# Altium PCB STM32F103最小系统板.PcbDoc
Units mm, origin at the board's own origin, x right, y up, seen from the top; angles counter-clockwise.
Board outline 39.3 x 39.28 mm, 2 copper layers (Top Layer, Bottom Layer); 25 components, 60 nets, 131 pads, 48 vias.
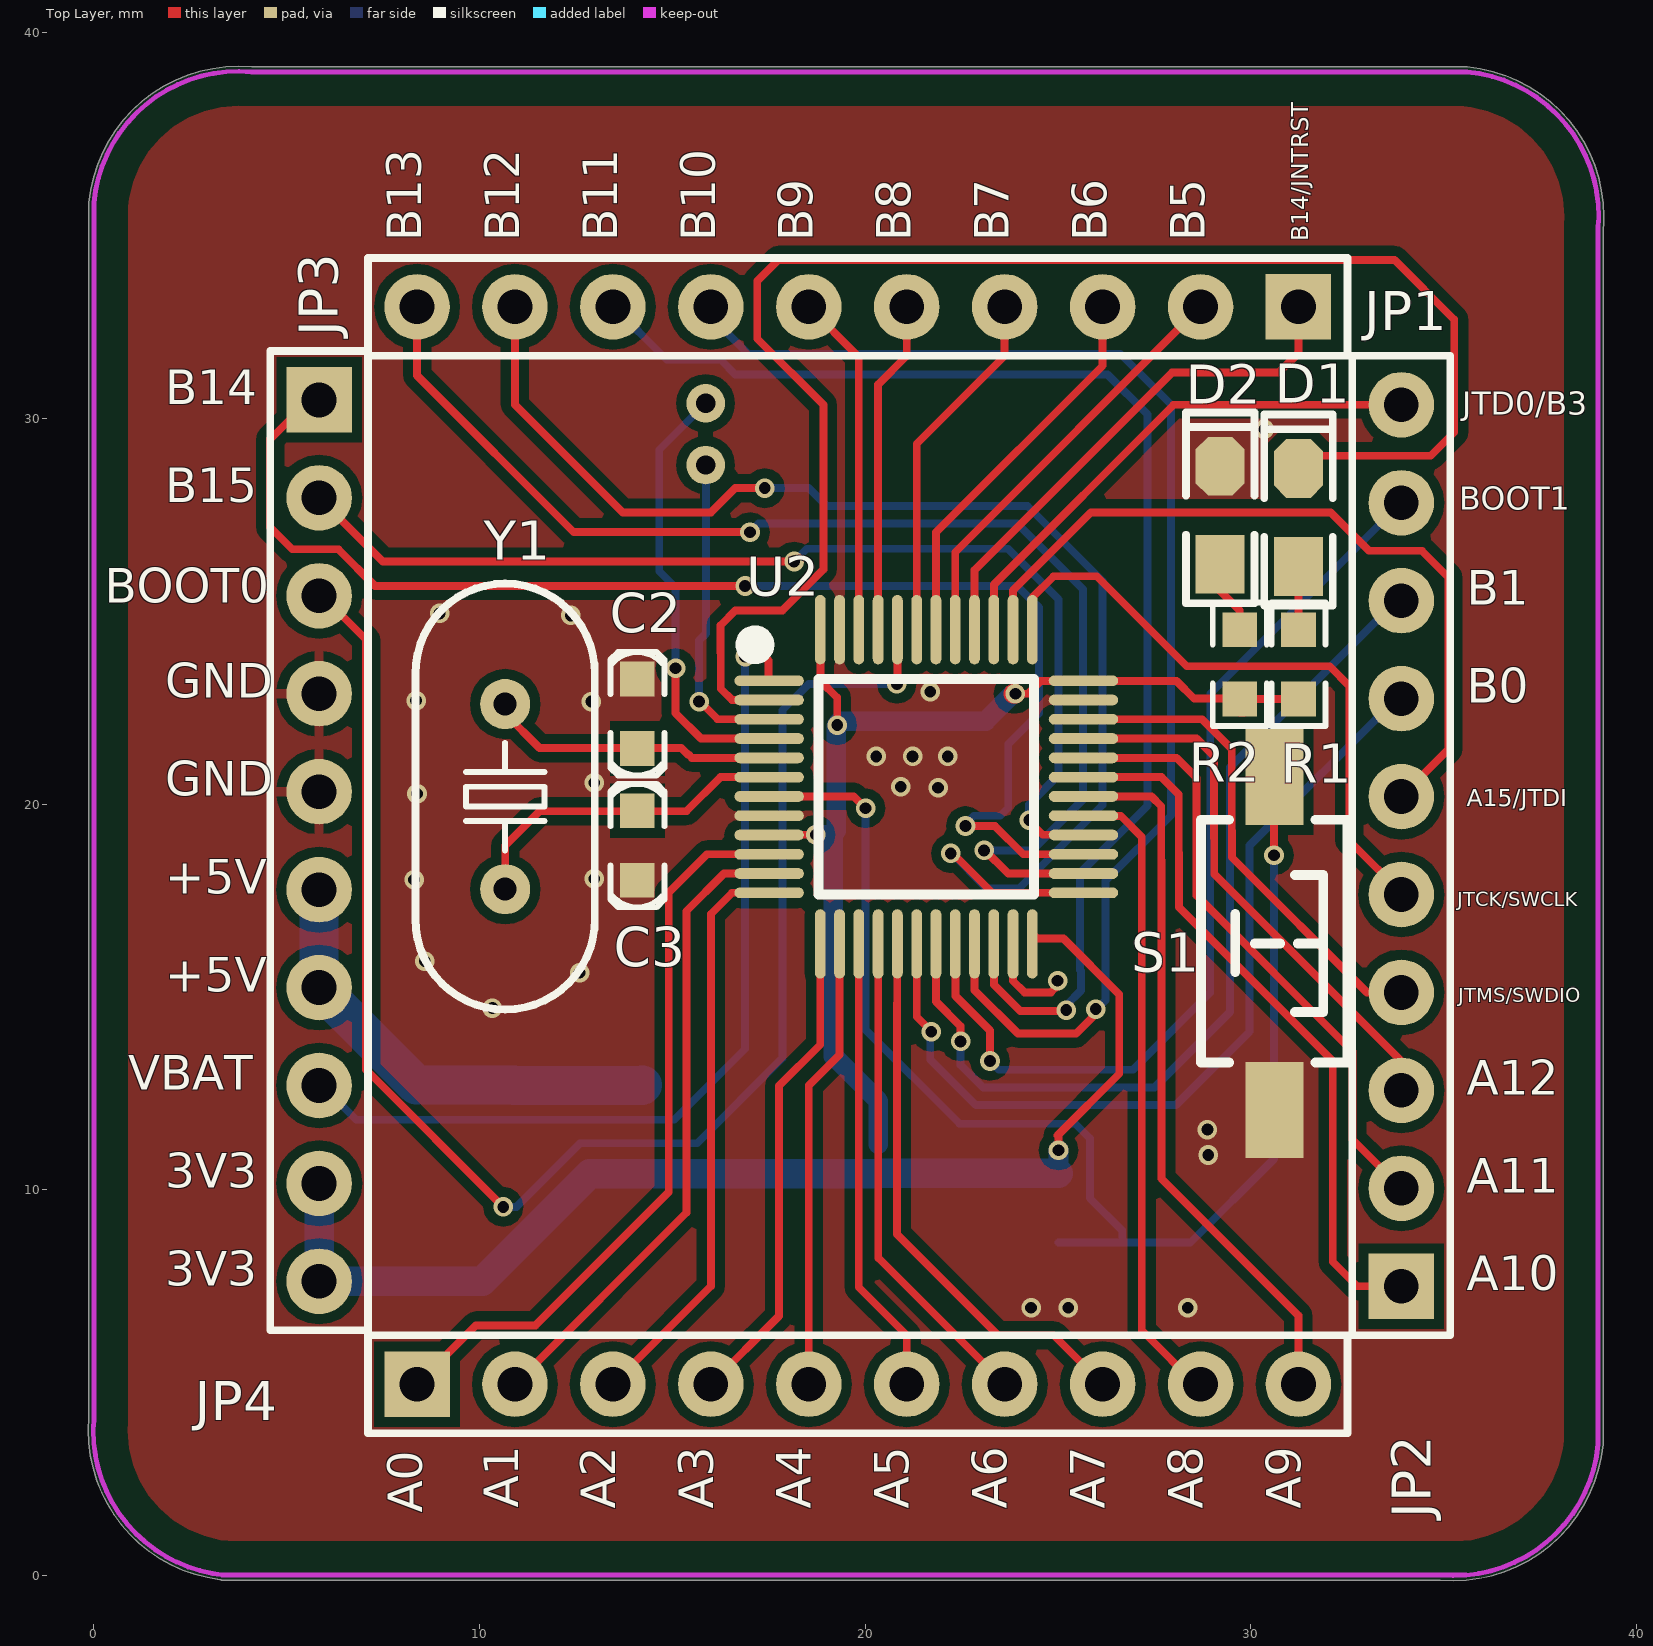
[diagram p0: Top Layer view]
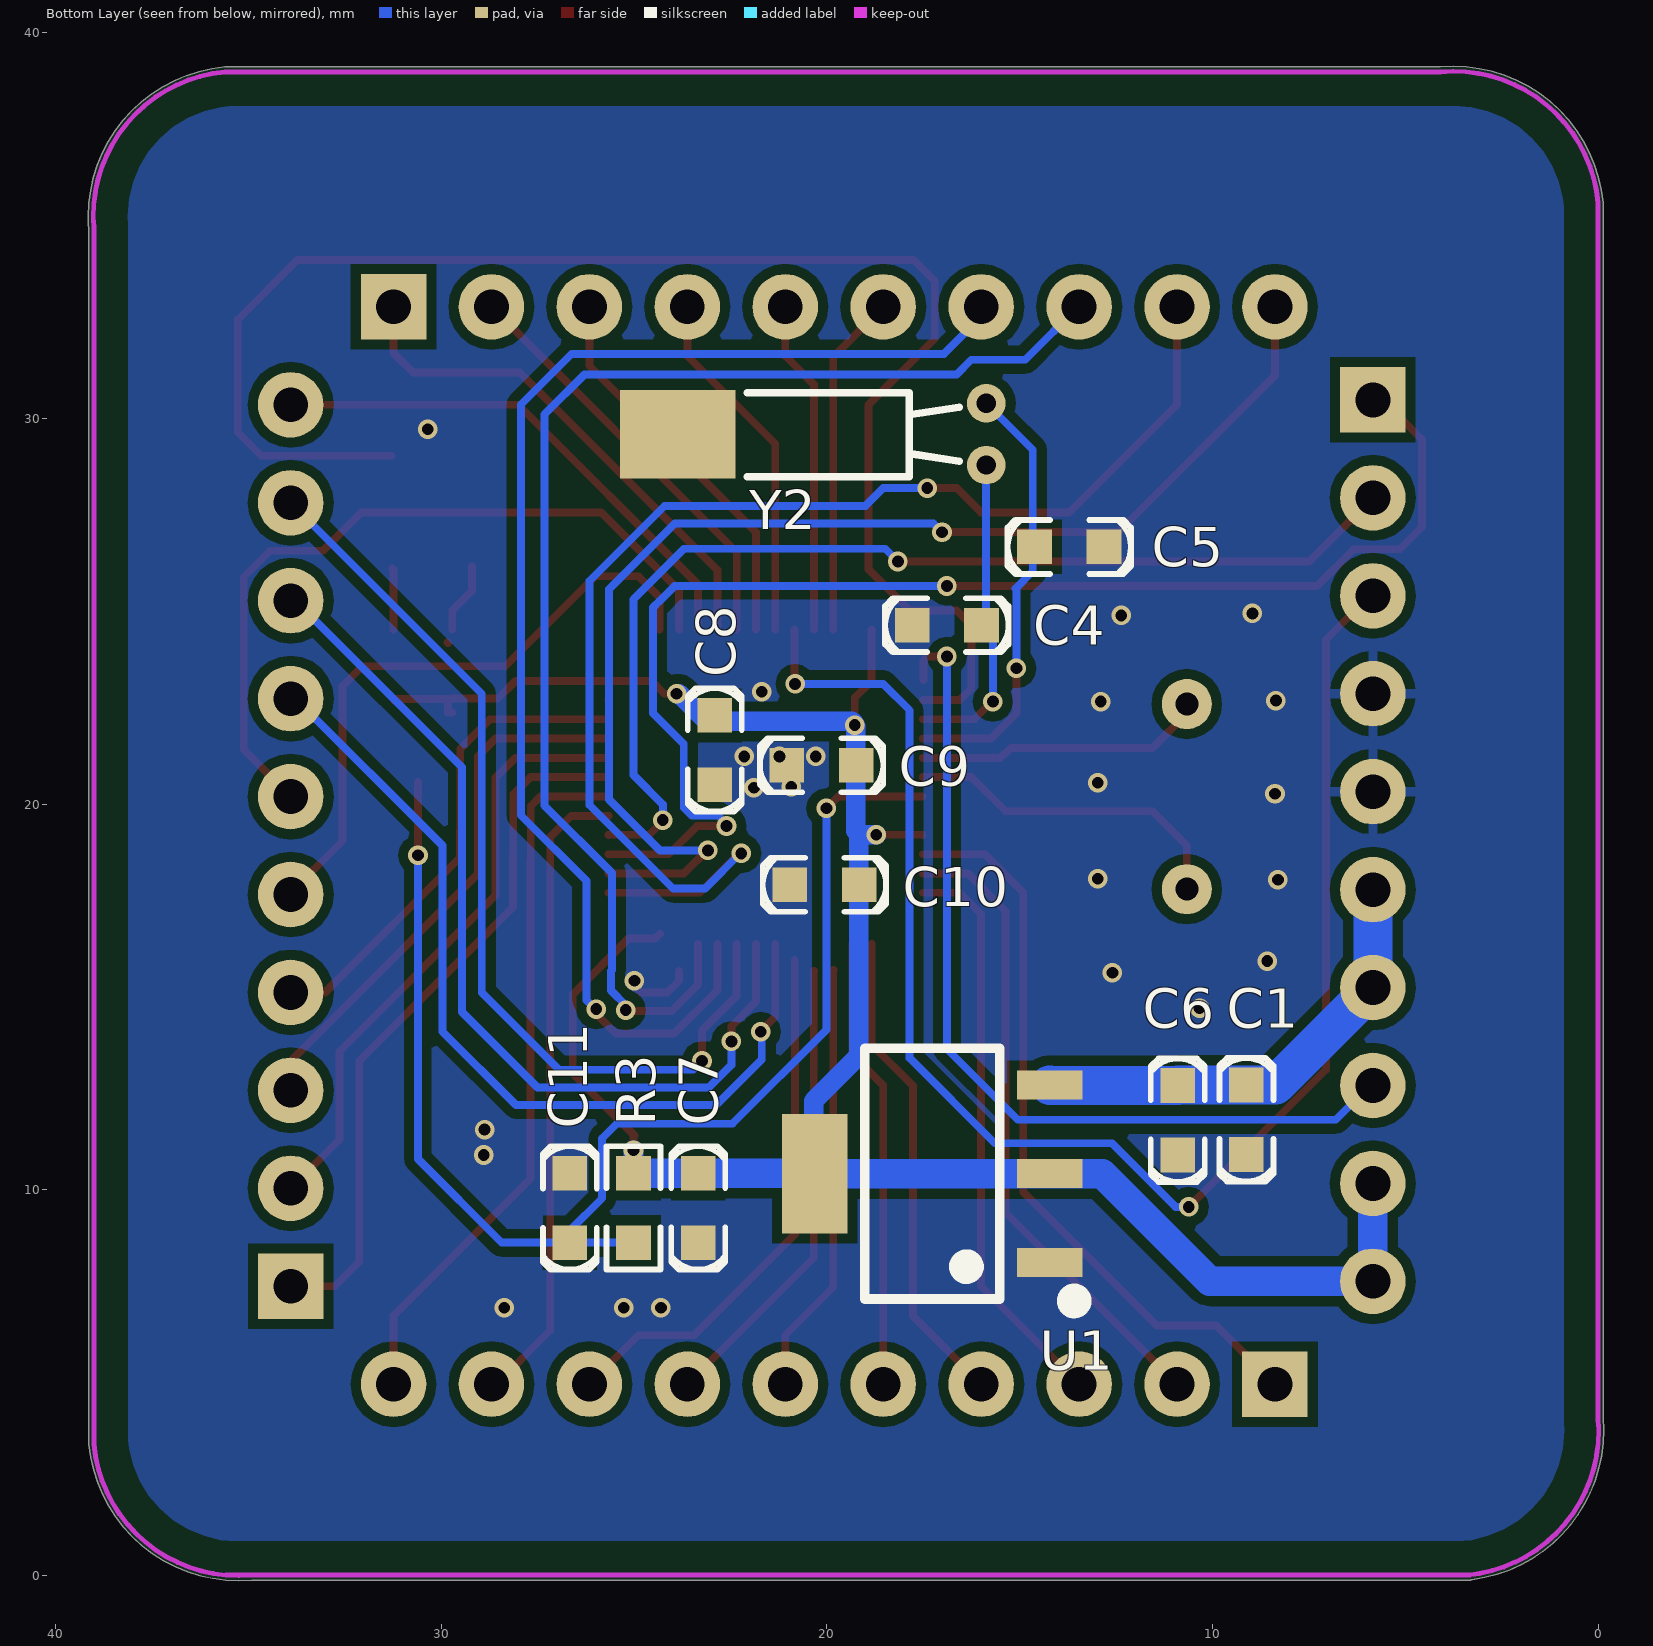
[diagram p1: Bottom Layer view, seen from below]

## Layer stack, top to bottom
Top Solder: solder mask 0.0102, Solder Resist, Dk 3.5
Top Layer: signal copper 0.0356
Dielectric 1: dielectric 0.32, FR-4, Dk 4.8
Bottom Layer: signal copper 0.0356
Bottom Solder: solder mask 0.0102, Solder Resist, Dk 3.5

## Board outline
3.27,-0.114 cw(c3.746,3.746) -0.127,4.095 -0.127,35.56 cw(c0,35.56) -0.127,35.573 cw(c0,35.585) -0.127,35.597 cw(c3.746,35.242) 4.095,39.116 35.611,39.116 cw(c35.611,38.989) 35.622,39.116 cw(c35.268,35.242) 39.157,35.242 cw(c35.268,35.242) 39.142,34.894 39.142,3.429 cw(c39.014,3.429) 39.141,3.416 cw(c39.014,3.404) 39.142,3.404 cw(c39.014,3.404) 39.141,3.392 cw(c35.268,3.746) 34.919,-0.127 3.327,-0.127 cw(c3.327,0)

## Design rules (kind name [scope] priority, off if disabled: settings)
Clearance [All] p1: gap=0.254 ignorepadtopadclearanceinfootprint=FALSE except(0: Arc-Hole Track-Hole SMDPad-Hole THPad-Hole Via-Hole Fill-Hole Poly-Hole Region-Hole Text-Hole; 0.127: SMDPad-SMDPad; 0.203: Arc-Arc Arc-Track Track-Track)
MinimumSolderMaskSliver [All] p1: minsoldermaskwidth=0.051
PolygonConnect [IsVia] p1: connectstyle=Direct reliefconductorwidth=0.381 reliefentries=4 polygonreliefangle="90 Angle" airgapwidth=0.381
PolygonConnect PolygonConnect_1 [All] p2: thpad.connectstyle=Relief thpad.reliefconductorwidth=0.254 thpad.reliefentries=4 thpad.polygonreliefangle="90 Angle" thpad.airgapwidth=0.254 smdpad.connectstyle=Direct smdpad.reliefconductorwidth=0.254 smdpad.reliefentries=4 smdpad.polygonreliefangle="90 Angle" smdpad.airgapwidth=0.254 via.connectstyle=Relief via.reliefconductorwidth=0.254 via.reliefentries=4 via.polygonreliefangle="90 Angle" via.airgapwidth=0.254
RoutingVias [All] p1: holewidth=0.711 width=1.27 viastyle="Through Hole" minholewidth=0.711 minwidth=1.27 maxholewidth=0.711 maxwidth=1.27
SilkToSilkClearance [All] p1: silktosilkclearance=0.051
SilkToSolderMaskClearance [IsPad] p1: minsilkscreentomaskgap=0 clearancetoexposedcopper=TRUE
SolderMaskExpansion [All] p1: expansion=0.102
UnRoutedNet [All] p1: checkbadconnections=TRUE
Width [InNet('No Net')] p1: maxlimit=2.54 minlimit=0.152 preferedwidth=0.254 minimp=50.000000 maximp=50.000000 favimp=50.000000
26 further rules are at their usual default settings.

## Classes and differential pairs
component class STM32F103最小系统板: C7 C9 C10 C11 D1 S1 U2 Y1 Y2

## Components (designator, comment, footprint, x,y, rotation, side; value= is the part's Value field where it differs from the comment)
C1 "X7R\10uF\50V\10%" C0603 9.125,11.811 r270 bottom locked
C2 "22pF" C0603 14.097,22.341 r270 top locked
C3 "22pF" C0603 14.097,18.923 r90 top locked
C4 "22pF" C0603 16.891,24.638 r180 bottom
C5 "22pF" C0603 13.716,26.67 r0 bottom
C6 "X7R\100nF\50V\10%" C0603 10.903,11.8 r270 bottom locked
C7 "X7R\10uF\50V\10%" C0603 23.34,9.525 r270 bottom locked
C8 "X7R\10uF\50V\10%" C0603 22.911,21.401 r270 bottom
C9 "X7R\10uF\50V\10%" C0603 20.142,21.006 r0 bottom
C10 "X7R\10uF\50V\10%" C0603 20.066,17.907 r0 bottom
C11 "X7R\100nF\50V\10%" C0603 26.67,9.525 r90 bottom locked
D1 "LED\0805" "LED 0805R" 31.242,27.432 r90 top
D2 "LED\0805" "LED 0805R" 29.21,27.491 r90 top
JP1 "HDR-1X10" HDR2.54-LI-10P 19.812,32.893 r180 top locked
JP2 "HDR-1X10" HDR2.54-LI-10P 33.909,18.923 r90 top locked
JP3 "HDR-1X10" HDR2.54-LI-10P 5.842,19.05 r270 top locked
JP4 "HDR-1X10" HDR2.54-LI-10P 19.812,4.953 r0 top locked
R1 "300R\1%\R0603" R0603 31.242,23.622 r270 top
R2 "300R\1%\R0603" R0603 29.718,23.622 r270 top
R3 "10K\1%\R0603" R0603 25.019,9.525 r270 bottom locked
S1 "SW-PB" "TSW SMD-3*6*4.3" 30.616,16.383 r270 top locked
U1 "AMS1117-3.3V" SOT223_L 17.272,10.414 r90 bottom locked
U2 "STM32F103C8T6" LQFP48-7*7 21.59,20.447 r270 top locked
Y1 "8MHz" "OSC HC-49S" 10.668,20.193 r90 top locked
Y2 "32.768KHz" OSC-2x6-WI-B 15.868,29.591 r90 bottom locked

## Footprints (in the part's own frame and the unit in brackets; to place one, negate y for a bottom-side part, rotate by r counter-clockwise, add the part's x,y. Pads: shape width x height; smd on the part's side, far side on the other; paste and mask are expansions set on the pad)
C0603 [mm]
  rect 0.9x0.9 smd: 1(-0.9,0) 2(0.9,0)
  silkscreen extent -1.6,-0.7 1.6,0.7, body extent -0.8,-0.4 0.8,0.4, height 0.3
HDR2.54-LI-10P [mm] "排针，10脚"
  rect 1.7x1.7 hole 0.9: 1(-11.43,0)
  round 1.7 hole 0.9: 2(-8.89,0) 3(-6.35,0) 4(-3.81,0) 5(-1.27,0) 6(1.27,0) 7(3.81,0) 8(6.35,0) 9(8.89,0) 10(11.43,0)
  silkscreen extent -12.7,-1.27 12.7,1.27, body extent -12.7,-1.27 12.7,1.27, height 8.5
"LED 0805R" [mil] "红色0805LED"
  rect 60x50 smd: 1(-50,0)
  oct 60x50 smd: 2(50,0)
  silkscreen extent -90,-35 105,35, body extent -39,-25 39,25, height 32
LQFP48-7*7 [mm] "7x7mm，0.5mm（蒜米工坊）"
  oval 0.279x1.8 smd: 1(-2.75,-4.075) 2(-2.25,-4.075) 3(-1.75,-4.075) 4(-1.25,-4.075) 5(-0.75,-4.075) 6(-0.25,-4.075) 7(0.25,-4.075) 8(0.75,-4.075) 9(1.25,-4.075) 10(1.75,-4.075) 11(2.25,-4.075) 12(2.75,-4.075) 25(2.75,4.075) 26(2.25,4.075) 27(1.75,4.075) 28(1.25,4.075) 29(0.75,4.075) 30(0.25,4.075) 31(-0.25,4.075) 32(-0.75,4.075) 33(-1.25,4.075) 34(-1.75,4.075) 35(-2.25,4.075) 36(-2.75,4.075)
  oval 1.8x0.279 smd: 13(4.075,-2.75) 14(4.075,-2.25) 15(4.075,-1.75) 16(4.075,-1.25) 17(4.075,-0.75) 18(4.075,-0.25) 19(4.075,0.25) 20(4.075,0.75) 21(4.075,1.25) 22(4.075,1.75) 23(4.075,2.25) 24(4.075,2.75) 37(-4.075,2.75) 38(-4.075,2.25) 39(-4.075,1.75) 40(-4.075,1.25) 41(-4.075,0.75) 42(-4.075,0.25) 43(-4.075,-0.25) 44(-4.075,-0.75) 45(-4.075,-1.25) 46(-4.075,-1.75) 47(-4.075,-2.25) 48(-4.075,-2.75)
  silkscreen extent -3.93,-4.69 2.79,2.79, body extent -4.5,-4.5 4.5,4.5, height 1.45
"OSC HC-49S" [mm]
  round 1.3 hole 0.6: 1(-2.4,0) 2(2.4,0)
  silkscreen extent -5.52,-2.32 5.52,2.33, body extent -5.53,-2.32 5.53,2.32, height 4.13
OSC-2x6-WI-B [mm] "脚距：1.6mm"
  rect 2.3x3 smd: 0(0,8)
  round 1 hole 0.5: 1(0.8,0) 2(-0.8,0)
  silkscreen extent -1.1,0.7 1.07,6.2, body extent -1,-0.16 1,8, height 2.05
R0603 [mm]
  rect 0.9x0.9 smd: 1(-0.9,0) 2(0.9,0)
  silkscreen extent -1.6,-0.7 1.6,0.7, body extent -1.3,-0.5 1.3,0.5, height 0.53
SOT223_L [mm] "6.4x7x1.6mm(长宽高)"
  rect 0.75x1.7 smd: 1(-2.3,-3.048) 2(0,-3.048) 3(2.3,-3.048)
  rect 3.1x1.7 smd: 2(0,3.048)
  silkscreen extent -3.5,-3.88 3.25,1.75, body extent -3.25,-3.51 3.25,3.51, height 1.65
"TSW SMD-3*6*4.3" [mm] "3*6*4.3mm"
  rect 2.5x1.5 smd: 1(-4.318,0) 2(4.318,0)
  silkscreen extent -3.21,-1.9 3.09,1.9, body extent -4.6,-1.75 4.6,1.75, height 4.4

## Part data
C1 C2 C3 C4 C5 C6 C7 C8 C9 C10 C11: library part C, "Capacitor"
D1 D2: library part LED, "红色"
JP1 JP2 JP3 JP4: library part "Header 10", "10P接插件"
R1 R2 R3: library part R, "电阻"
S1: "Switch", LatestRevisionDate=17-Jul-2002, LatestRevisionNote="Re-released for DXP Platform.", PackageDescription="Switch; 2 Leads", PackageReference=SPST-2, Published=24-Mar-1999, Publisher="Altium Limited"
U2: "48PIN"
Y1 Y2: library part XTAL, "2脚无源脚晶振", LatestRevisionDate=17-Jul-2002, LatestRevisionNote="Re-released for DXP Platform.", PackageDescription="Crystal, Thru-Hole; 2 Leads; Body 3.1 x 8.2 mm (Dia.xH)", PackageReference=R38, Published=8-Jun-2000, Publisher="Altium Limited"

## Via types
v1: diameter 0.508, hole 0.305, Top Layer to Bottom Layer, 25 vias
v2: diameter 0.508, hole 0.305, Top Layer to Bottom Layer, tented both sides, 23 vias

## Nets (pads, with @x,y where several pads share a name; then routed paths per layer and width w, separated by ;. In a path a pad name is that pad's centre, name@x,y a point inside that pad or via, vN(x,y) a via of type N, cw(c..) or ccw(c..) an arc to the next point about the centre after c; other vN are vias at no path point)
3.3V: 
3V3: C7.1 C8.1 C9.1 C10.1 JP3.9 JP3.10 R1.2 R2.2 R3.1 U1.2 U2.9 U2.24 U2.36 U2.48 | length 59.8
  Top Layer w0.203: U2.9 17.519,19.202 v2(18.72,19.202) ; U2.48 18.845,24.518 18.845,23.193 19.279,22.759 v2(19.279,22.047) ; v2(23.901,22.86) 24.221,22.86 24.553,23.192 28.079,23.192 28.538,22.733 R2.2@29.718,22.733 ; U2.24@24.335,16.637 24.462,16.51 25.146,16.51 26.594,15.062 26.594,13.005 24.994,11.405 25.019,11.379 v2(25.019,11.024) ; R2.2@29.718,22.37 29.825,22.37 R2.2@29.825,22.721 ; R2.2 31.177,22.722 R1.2@31.217,22.682
  Top Layer w0.508: v2@23.84,22.86 v2(23.901,22.86)
  Bottom Layer w0.508: v2(18.72,19.202) 19.147,19.202 19.177,19.232 ; U1.2@20.345,11.176 20.345,12.294 19.177,13.462 19.177,19.202 19.177,19.232 ; v2@23.84,22.86 23.129,22.149 19.355,22.149 19.279,22.073 v2(19.279,22.047) 19.253,22.022 19.253,19.309 19.177,19.232 ; R3.1@25.019,10.541 24.994,10.566 25.019,10.592 v2(25.019,11.024)
  Bottom Layer w0.762: JP3.9 JP3.10 10.07,7.62 12.864,10.414 14.224,10.414 20.32,10.414 20.331,10.425 C7.1 R3.1
5Vin: C1.1 C6.1 JP3.6 JP3.7 U1.3 | length 12
  Bottom Layer w1.016: JP3.6 JP3.7 8.371,12.711 C1.1 10.892,12.711 C6.1 14.21,12.7 U1.3
BOOT0: JP3.3 U2.44 | length 40.3
  Top Layer w0.203: JP3.3@5.918,25.4 7.061,24.257 7.061,13.106 v2(10.617,9.55) ; U2.44 20.84,23.077 v2@20.853,23.063
  Bottom Layer w0.203: v2@10.653,9.55 10.959,9.55 12.61,11.201 15.646,11.201 17.856,13.411 17.856,22.428 18.542,23.114 v2(20.828,23.114)
GND: C1.2 C2.1 C3.1 C4.1 C5.1 C6.2 C7.2 C8.2 C9.2 C10.2 C11.2 D2.2 JP3.4 JP3.5 S1.2 U1.1 U2.8 U2.23 U2.35 U2.47 | length 1.7
  Top Layer w0.203: U2.23@23.835,15.672 23.835,15.416 24.135,15.116 24.82,15.116 24.994,15.289 v1(24.994,15.418) ; U2.35@25.665,22.692 U2.35
  other v1: 24.308,6.934 25.273,6.934 28.372,6.934 28.905,10.897 28.88,11.557 10.338,14.707 12.598,15.621 8.585,15.926 8.306,18.034 12.979,18.059 8.382,20.269 21.895,20.422 20.93,20.447 12.979,20.549 20.295,21.234 21.234,21.234 22.149,21.234 12.903,22.657 8.357,22.682 21.692,22.911 12.37,24.892 8.966,24.943 30.353,29.718
NetC1_2: 
NetC2_1: 
NetC3_2: 
NetC4_1: 
NetD1_1: D1.1 R1.1 | length 1.6
  Top Layer w0.203: R1.1 31.242,26.086 D1.1@31.267,26.111
NetD2_1: D2.1 R2.1 | length 1.9
  Top Layer w0.203: D2.1@29.21,26.162 29.21,25.527 29.718,25.019 R2.1 ; R2.1@29.825,24.17 R2.1@29.845,24.189
NetLED1_1: 
NetLED2_1: 
NRST: C11.1 R3.2 S1.1 U2.7 | length 34.7
  Top Layer w0.203: U2.7 19.706,20.197 v2(20.015,19.888) v2@20.066,19.837 ; v2(30.607,18.669) S1.1@30.607,20.574
  Bottom Layer w0.203: v2@20.015,19.837 20.015,14.148 22.454,11.709 25.451,11.709 25.832,11.328 25.832,9.779 26.67,8.941 C11.1@26.67,8.636 ; R3.2 26.659,8.625 C11.1@26.67,8.636 ; v2(30.607,18.669) 30.607,10.795 28.437,8.625 C11.1 C11.1@26.67,8.636
PA0: 
PA0-WKUP: JP4.1 U2.10 | length 19.4
  Top Layer w0.203: JP4.1 9.906,6.477 11.451,6.477 14.91,9.936 14.91,17.704 15.903,18.697 U2.10
PA1: JP4.2 U2.11 | length 16.7
  Top Layer w0.203: JP4.2 15.367,9.398 15.367,17.219 16.345,18.197 U2.11
PA2: JP4.3 U2.12 | length 15
  Top Layer w0.203: JP4.3 16.002,7.493 16.002,17.145 16.554,17.697 U2.12
PA3: JP4.4 U2.13 | length 12.6
  Top Layer w0.203: JP4.4 17.772,6.723 17.772,12.692 18.84,13.76 U2.13
PA4: JP4.5 U2.14 | length 11.7
  Top Layer w0.203: JP4.5 18.542,12.7 19.34,13.498 U2.14
PA5: JP4.6 U2.15 | length 11.3
  Top Layer w0.203: U2.15@19.835,15.697 19.837,15.695 19.837,7.468 21.082,6.223 JP4.6
PA6: JP4.7 U2.16 | length 12.1
  Top Layer w0.203: U2.16@20.335,15.672 20.345,15.662 20.345,14.86 ; 20.345,14.859 20.345,8.23 JP4.7
PA7: JP4.8 U2.17 | length 14.1
  Top Layer w0.203: U2.17@20.835,15.951 20.835,14.839 20.828,14.832 20.828,8.843 23.448,6.223 24.892,6.223 JP4.8
PA8: JP4.9 U2.29 | length 16.7
  Top Layer w0.203: U2.29 25.67,19.692 26.631,19.692 27.178,19.145 27.178,6.35 JP4.9@28.702,4.826
PA9: JP4.10 U2.30 | length 18.6
  Top Layer w0.203: U2.30@25.67,20.192 U2.30 27.428,20.197 27.682,19.943 27.682,18.546 27.686,18.542 27.686,10.287 31.242,6.731 JP4.10
PA10: JP2.1 U2.31 | length 18.5
  Top Layer w0.203: U2.31 27.69,20.697 28.139,20.248 28.139,18.736 28.143,18.731 28.143,17.323 32.131,13.335 32.131,8.128 32.766,7.493 JP2.1
PA11: JP2.2 U2.32 | length 16
  Top Layer w0.203: U2.32 28.079,21.197 28.596,20.68 28.596,18.925 28.6,18.921 28.6,17.628 32.639,13.589 32.639,11.303 JP2.2
PA12: JP2.3 U2.33 | length 14.1
  Top Layer w0.203: U2.33 28.595,21.697 29.053,21.239 29.053,19.114 29.058,19.11 29.058,18.186 33.909,13.335 JP2.3@33.909,12.7
PA13: 
PA13/JTMS/SWDIO: JP2.4 U2.34 | length 12.8
  Top Layer w0.203: U2.34 28.742,22.197 29.51,21.428 29.51,19.304 29.515,19.299 29.515,18.618 33.02,15.113 JP2.4
PA14: 
PA14/JTCK/SWCLK: JP2.5 U2.37 | length 16.5
  Top Layer w0.203: U2.37 24.34,25.356 24.892,25.908 26.01,25.908 28.346,23.571 32.055,23.571 32.563,23.063 32.563,19.05 JP2.5@34.011,17.602
PA15: 
PA15/JTDI: JP2.6 U2.38 | length 20.1
  Top Layer w0.203: U2.38 23.84,25.542 25.857,27.559 32.08,27.559 33.071,26.568 34.442,26.568 35.128,25.883 35.128,21.412 JP2.6@33.884,20.168
PB0: JP2.7 U2.18 | length 22.9
  Top Layer w0.203: U2.18 21.34,14.482 21.717,14.105 v2(21.717,14.097)
  Bottom Layer w0.203: v2@21.692,14.072 21.692,13.376 22.875,12.192 28.067,12.192 29.972,14.097 29.972,18.923 JP2.7@33.782,22.733 ; v2(21.717,14.097) v2@21.742,14.122
PB1: JP2.8 U2.19 | length 23.9
  Top Layer w0.203: U2.19 21.84,14.879 22.479,14.24 v2(22.479,13.843)
  Bottom Layer w0.203: v2(22.479,13.843) 22.479,13.235 23.065,12.649 27.508,12.649 29.464,14.605 29.464,20.955 JP2.8@33.782,25.273
PB2: 
PB2/BOOT1: JP2.9 U2.20 | length 24.8
  Top Layer w0.203: U2.20 22.345,16.367 22.345,15.021 23.241,14.125 v2(23.241,13.335)
  Bottom Layer w0.203: v2(23.241,13.335) 23.47,13.106 26.949,13.106 28.956,15.113 28.956,22.86 JP2.9
PB3: 
PB3/JTDO: JP2.10 U2.39 | length 13.7
  Top Layer w0.203: U2.39 23.345,24.527 23.345,25.693 28.005,30.353 JP2.10
PB4: 
PB4/JNTRST: JP1.1 U2.40 | length 13.5
  Top Layer w0.203: U2.40 22.84,26.066 27.965,31.191 30.734,31.191 31.242,31.699 JP1.1 JP1.1@31.242,32.918
PB5: JP1.2 U2.41 | length 11
  Top Layer w0.203: U2.41 22.34,26.531 JP1.2
PB6: JP1.3 U2.42 | length 10.2
  Top Layer w0.203: U2.42 21.84,27.047 26.162,31.369 JP1.3
PB7: JP1.4 U2.43 | length 9.3
  Top Layer w0.203: U2.43 21.34,29.341 23.622,31.623 JP1.4
PB8: JP1.5 U2.45 | length 8.7
  Top Layer w0.203: U2.45 20.34,30.881 21.082,31.623 JP1.5
PB9: JP1.6 U2.46 | length 8.9
  Top Layer w0.203: JP1.6 19.84,31.595 U2.46
PB10: JP1.7 U2.21 | length 35
  Top Layer w0.203: U2.21 22.84,15.172 23.966,14.046 25.475,14.046 25.984,14.556 v2(25.984,14.681)
  Bottom Layer w0.203: JP1.7@15.672,32.893 15.748,32.893 16.967,31.674 26.619,31.674 27.94,30.353 27.94,19.71 26.238,18.009 26.238,14.91 26.01,14.681 v2(25.984,14.681)
PB11: JP1.8 U2.22 | length 34.6
  Top Layer w0.203: U2.22 23.345,16.367 23.345,15.314 24.028,14.63 25.171,14.63 v2@25.197,14.656
  Bottom Layer w0.203: JP1.8@13.437,32.944 14.859,31.521 16.256,31.521 16.637,31.14 26.289,31.14 27.329,30.1 27.329,19.963 25.578,18.212 25.578,15.696 25.603,15.67 25.603,15.165 25.222,14.784 v2(25.222,14.656)
PB12: JP1.9 U2.25 | length 35
  Top Layer w0.203: JP1.9 10.922,30.353 13.716,27.559 16.002,27.559 16.637,28.194 v2(17.399,28.194) ; v1@22.301,18.694 23.299,17.697 U2.25
  Bottom Layer w0.203: v2(17.399,28.194) 18.542,28.194 19.004,27.732 24.211,27.732 26.162,25.781 26.162,19.979 23.989,17.805 23.165,17.805 v1@22.225,18.745
  other v1: 22.225,18.72
PB13: JP1.10 U2.26 | length 32.9
  Top Layer w0.203: JP1.10@8.382,32.766 8.382,31.115 12.446,27.051 v2(17.018,27.051) ; v2(23.089,18.796) 23.089,18.821 23.713,18.197 U2.26
  Bottom Layer w0.203: v2(17.018,27.051) 17.242,27.275 23.95,27.275 25.654,25.571 25.654,20.117 24.333,18.796 v2(23.089,18.796) v2@23.063,18.821
PB14: JP3.1 U2.27 | length 34.8
  Top Layer w0.203: JP3.1@5.588,30.48 4.572,29.464 4.572,27.178 5.144,26.606 6.341,26.606 7.293,25.654 v2(16.891,25.654) ; v2(22.606,19.431) 23.368,19.431 24.102,18.697 U2.27
  Bottom Layer w0.203: v2(16.891,25.654) 23.952,25.654 24.359,25.248 ; v2@22.581,19.456 22.82,19.696 23.508,19.696 23.716,19.904 23.716,21.557 24.511,22.352 24.511,25.097 24.34,25.268
PB15: JP3.2 U2.28 | length 28.2
  Top Layer w0.203: JP3.2 7.493,26.289 v2(18.161,26.289) ; v2(24.257,19.583) 24.232,19.583 24.613,19.202 25.665,19.202 U2.28
  Bottom Layer w0.203: v2(18.161,26.289) 18.491,26.619 23.707,26.619 25.019,25.308 25.019,20.752 24.257,19.99 ; v2(24.257,19.583) 24.257,19.939
PC13: D1.2 U2.2 | length 40.6
  Top Layer w0.203: U2.2 17.51,22.702 16.549,22.702 16.259,22.992 16.259,23.93 16.256,23.933 16.256,24.638 16.637,25.019 17.856,25.019 18.923,26.086 18.923,30.353 17.208,32.068 17.208,33.565 17.755,34.112 33.731,34.112 35.281,32.563 35.281,29.642 34.671,29.032 D1.2@31.293,29.032
PC14: C4.2 U2.3 Y2.2 | length 8
  Top Layer w0.203: v2@15.868,22.507 16.177,22.197 U2.3
  Bottom Layer w0.203: v2(15.697,22.657) 15.697,24.244 15.875,24.421 15.875,28.784 Y2.2
PC15: C5.2 U2.4 Y2.1 | length 11.4
  Top Layer w0.203: v2(15.088,23.52) 15.088,22.357 15.748,21.697 U2.4
  Bottom Layer w0.203: v2(15.088,23.52) 15.088,25.561 15.113,25.586 14.664,26.035 14.664,27.051 14.664,29.187 Y2.1
PD0: C2.2 U2.5 Y1.2 | length 7.6
  Top Layer w0.203: Y1.2 10.668,22.341 11.557,21.452 14.605,21.452 15.233,21.452 15.403,21.283 15.42,21.283 15.506,21.197 U2.5
PD1: C3.2 U2.6 Y1.1 | length 8.7
  Top Layer w0.203: Y1.1 10.668,18.923 11.557,19.812 14.605,19.812 15.367,19.812 16.252,20.697 U2.6
VBAT: JP3.8 U2.1 | length 23.5
  Top Layer w0.203: v2(16.891,23.825) 17.399,23.825 17.501,23.724 U2.1@17.501,23.216
  Bottom Layer w0.203: JP3.8@5.842,12.776 6.807,11.811 15.049,11.811 16.891,13.653 v2(16.891,23.825)
VCC: 
pads on no net: Y2.0

## Polygon pours and split planes (outlines as drawn)
GND on Top Layer "Top Layer-GND" (solid, remove dead copper, pour order 0): 0.025,39.04 0.051,39.014 38.989,39.014 38.989,0.051 38.964,0.025 0,0.025 0,38.989
GND on Bottom Layer "Bottom Layer-GND" (solid, remove dead copper, pour order 2): 38.719,39.138 38.719,0.124 38.693,0.149 -0.27,0.149 -0.245,0.175 -0.245,39.138

## Keep-outs
Keep-Out Layer:
  lines w0.127: 0,3.988 0,35.56 ; 0,4.089 ccw(c3.746,3.746) 3.404,0 ; 0,35.585 cw(c3.746,35.242) 4.089,38.989 35.611,38.989 cw(c35.268,35.242) 39.014,34.9 ; 3.327,0 35.585,0 ; 34.925,0 ccw(c35.268,3.746) 39.014,3.404 ; 39.014,3.429 39.014,35.001

## Silkscreen, mask and mechanical layers (free items; w line width, h text height)
Top Overlay:
  text "B13" at 8.788,34.595 h1.52 r90
  text "B12" at 11.328,34.595 h1.52 r90
  text "B11" at 13.868,34.595 h1.52 r90
  text "B10" at 16.408,34.595 h1.52 r90
  text "B9" at 18.948,34.595 h1.52 r90
  text "B8" at 21.488,34.595 h1.52 r90
  text "B7" at 24.028,34.595 h1.52 r90
  text "B6" at 26.568,34.595 h1.52 r90
  text "B5" at 29.108,34.595 h1.52 r90
  text "B14/JNTRST" at 31.648,34.595 h0.76 r90
  text "B14" at 1.854,30.074 h1.52
  text "JTD0/B3" at 35.484,29.896 h1.02
  text "B15" at 1.854,27.534 h1.52
  text "BOOT1" at 35.408,27.432 h1.02
  text "BOOT0" at 0.279,24.917 h1.52
  text "B1" at 35.611,24.867 h1.52
  text "GND" at 1.854,22.454 h1.52
  text "B0" at 35.611,22.327 h1.52
  text "GND" at 1.854,19.914 h1.52
  text "A15/JTDI" at 35.611,19.787 h0.76
  text "+5V" at 1.854,17.374 h1.52
  text "JTCK/SWCLK" at 35.357,17.221 h0.64
  text "+5V" at 1.854,14.834 h1.52
  text "JTMS/SWDIO" at 35.382,14.732 h0.64
  text "VBAT" at 0.889,12.294 h1.52
  text "A12" at 35.611,12.167 h1.52
  text "3V3" at 1.854,9.754 h1.52
  text "A11" at 35.611,9.627 h1.52
  text "3V3" at 1.854,7.214 h1.52
  text "A10" at 35.611,7.087 h1.52
  text "A1" at 11.303,1.753 h1.52 r90
  text "A2" at 13.818,1.727 h1.52 r90
  text "A3" at 16.358,1.727 h1.52 r90
  text "A4" at 18.898,1.727 h1.52 r90
  text "A5" at 21.438,1.727 h1.52 r90
  text "A6" at 23.978,1.727 h1.52 r90
  text "A7" at 26.518,1.727 h1.52 r90
  text "A8" at 29.058,1.727 h1.52 r90
  text "A9" at 31.598,1.727 h1.52 r90
  text "A0" at 8.814,1.626 h1.52 r90
Mechanical 1:
  lines w0.254: -3.619,1.674 -3.13,0.143 ; -3.384,0.147 -2.876,0.14 ; -3.174,37.615 -2.647,39.132 ; -2.988,11.615 -3.13,0.143 ; -2.901,39.136 -2.393,39.129 ; -2.789,27.661 -2.647,39.132 ; -2.603,1.661 -3.13,0.143 ; -2.158,37.602 -2.647,39.132 ; -0.026,41.046 -0.025,41.554 ; 1.498,40.791 -0.025,41.3 ; 1.499,41.807 -0.025,41.3 ; 11.242,41.293 -0.025,41.3 ; 27.29,41.282 38.557,41.275 ; 37.033,40.768 38.557,41.275 ; 37.034,41.784 38.557,41.275 ; 38.557,41.021 38.557,41.529
  text "38.583 (mm)" at 11.495,40.379 h1.52 r359.96
  text "38.992 (mm)" at -2.07,11.857 h1.52 r89.29